# Altium PCB Analog_Multiplier.PcbDoc
Units mil, origin at the board's own origin, x right, y up, seen from the top; angles counter-clockwise.
Board outline 6000 x 4000 mil, 2 copper layers (Top Layer, Bottom Layer); 16 components, 10 nets, 49 pads, 0 vias.
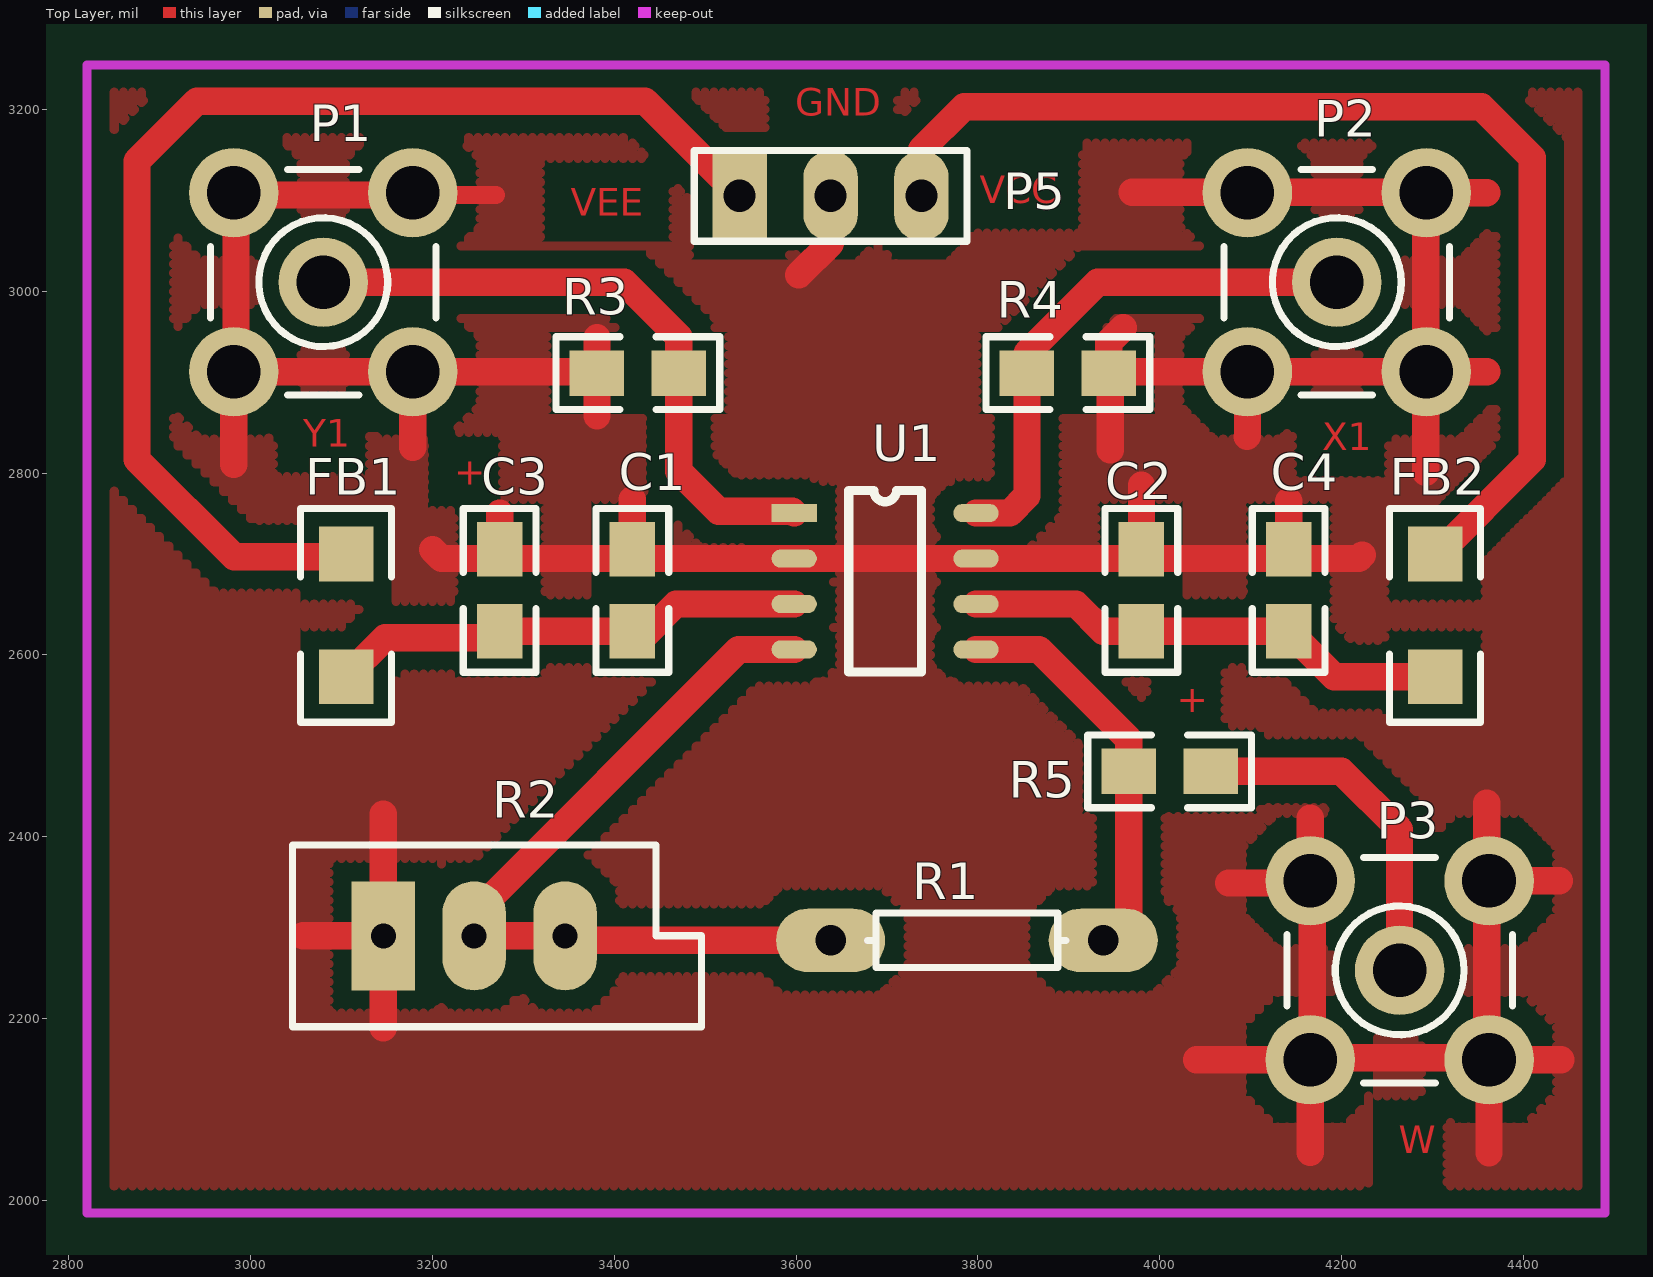
[diagram p0: Top Layer view]
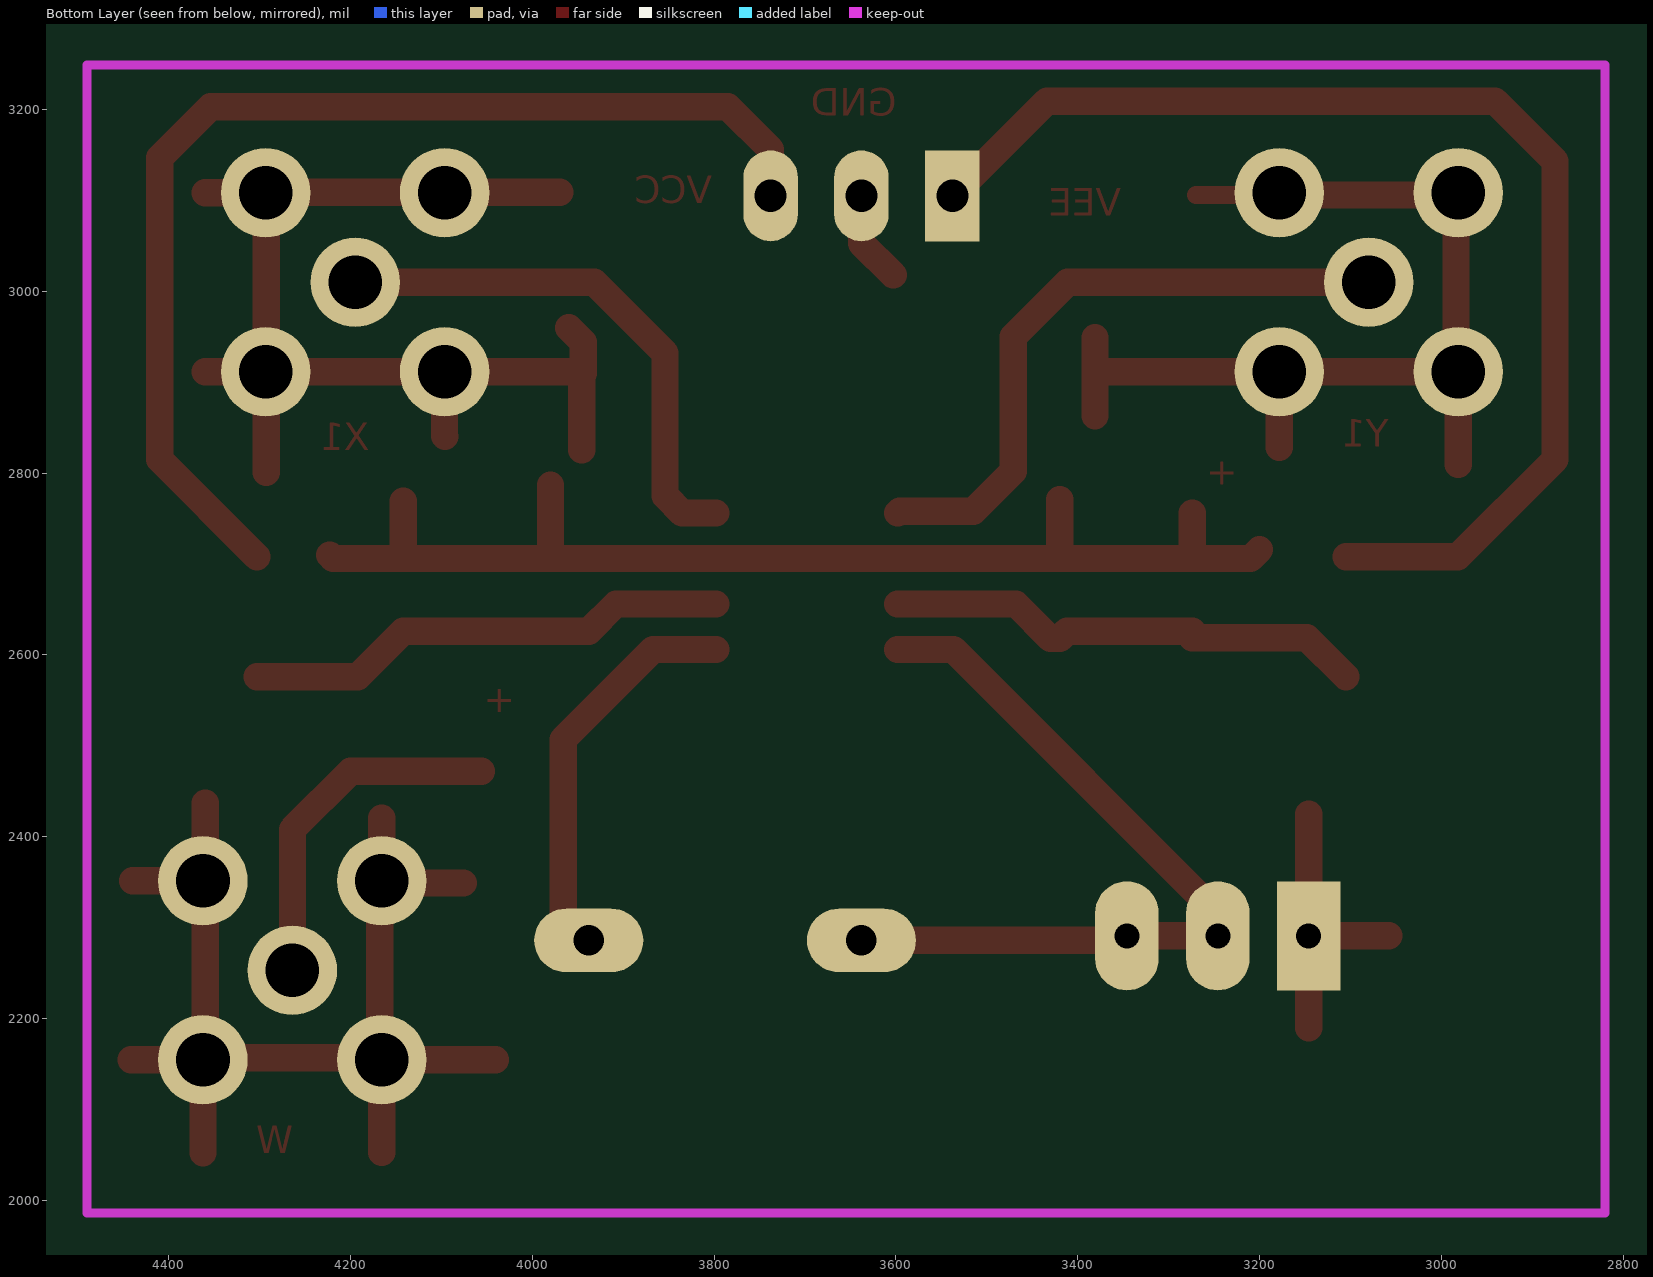
[diagram p1: Bottom Layer view, seen from below]

## Layer stack, top to bottom
Top Solder: solder mask 0.4, Solder Resist, Dk 3.5
Top Layer: signal copper 1.4
Dielectric1: dielectric 12.6, FR-4, Dk 4.8
Bottom Layer: signal copper 1.4
Bottom Solder: solder mask 0.4, Solder Resist, Dk 3.5

## Board outline
1000,1000 7000,1000 7000,5000 1000,5000

## Design rules (kind name [scope] priority, off if disabled: settings)
Clearance [All] p1: gap=20 ignorepadtopadclearanceinfootprint=FALSE except(0: Arc-Hole Track-Hole SMDPad-Hole THPad-Hole Via-Hole Fill-Hole Poly-Hole Region-Hole Text-Hole)
PolygonConnect [All] p1: connectstyle=Relief reliefconductorwidth=10 reliefentries=4 polygonreliefangle="90 Angle" airgapwidth=10
RoutingVias [All] p1: holewidth=28 width=50 viastyle="Through Hole" minholewidth=28 minwidth=50 maxholewidth=28 maxwidth=50
SilkToSolderMaskClearance SilkscreenOverComponentPads [IsPad] p1: minsilkscreentomaskgap=10 clearancetoexposedcopper=TRUE
SolderMaskExpansion [All] p1: expansion=4
Width [All] p1: maxlimit=50 minlimit=20 preferedwidth=30
29 further rules are at their usual default settings.

## Components (designator, comment, footprint, x,y, rotation, side; value= is the part's Value field where it differs from the comment)
C1 "Cap Pol3" 0805 3420,2716 r270 top
C2 "Cap Pol3" 0805 3980,2626 r90 top
C3 "Cap Semi" 0805 3274,2626 r90 top
C4 "Cap Semi" 0805 4142,2626 r90 top
FB1 "Res2" 1206 3105,2576 r90 top
FB2 "Res2" 1206 4303,2711 r270 top
P1 "SMB" SMB_V-RJ45 3080,3010 r0 top
P2 "SMB" SMB_V-RJ45 4195,3010 r0 top
P3 "SMB" SMB_V-RJ45 4264,2253 r270 top
P5 "Header 3" HDR1X3 3538,3105 r0 top
R1 "Res1" AXIAL-0.3 3788,2286 r0 top
R2 "RPot" VR5 3246,2291 r0 top
R3 "Res1" 0805 3471,2910 r180 top
R4 "Res1" 0805 3944,2910 r180 top
R5 "Res1" 0805 4056,2472 r180 top
U1 "AD835" "AD835_SOP8 - duplicate1" 3598,2756 r0 top

## Footprints (in the part's own frame and the unit in brackets; to place one, negate y for a bottom-side part, rotate by r counter-clockwise, add the part's x,y. Pads: shape width x height; smd on the part's side, far side on the other; paste and mask are expansions set on the pad)
0805 [mil]
  rect 60x50 smd: 1(0,0) 2(90,0)
  silkscreen extent -45,-40 135,40
1206 [mil]
  rect 60x60 smd: 1(0,0) 2(135,0)
  silkscreen extent -50,-50 185,50
"AD835_SOP8 - duplicate1" [mil]
  rect 50x20 smd: 1(0,0)
  oval 50x20 smd: 2(0,-50) 3(0,-100) 4(0,-150) 5(200,-150) 6(200,-100) 7(200,-50) 8(200,0)
  silkscreen extent 60,-175 140,25
AXIAL-0.3 [mil] "Axial Device, Thru-Hole; 2 Leads; 0.3 in P"
  oval 120x70 hole 33.46: 1(-150,0) 2(150,0)
  silkscreen extent -109,-30 109,30
HDR1X3 [mil] "Connector; Header;"
  rect 60x100 hole 35.43: 1(0,0)
  oval 60x100 hole 35.43: 2(100,0) 3(200,0)
  silkscreen extent -50,-50 250,50
SMB_V-RJ45 [mm] "Connector; S"
  round 2.5 hole 1.5: 1(0,0) 2(-2.5,-2.5) 2(-2.5,2.5) 2(2.5,-2.5) 2(2.5,2.5)
  silkscreen extent -3.15,-3.15 3.15,3.15
VR5 [mil] "Thru-Hol"
  rect 70x120 hole 27.56: 1(-100,0)
  oval 70x120 hole 27.56: 2(0,0) 3(100,0)
  silkscreen extent -200,-100 250,100

## Part data
C1 C2: "Polarized Capacitor"
C3 C4: "Capacitor (Semicond"
P1 P2 P3: "SMB Straight Connector"
P5: "Header, 3-Pin"
R1: "Resistor"
R2: "Potentiometer"
U1: library part Compone

## Nets (pads, with @x,y where several pads share a name; then routed paths per layer and width w, separated by ;. In a path a pad name is that pad's centre, name@x,y a point inside that pad or via, vN(x,y) a via of type N, cw(c..) or ccw(c..) an arc to the next point about the centre after c; other vN are vias at no path point)
GND: C1.1 C2.2 C3.2 C4.2 P1.2 P2.2 P3.2 P5.2 R2.1 R3.2 R4.1 U1.2 U1.7 | length 5461.2
  Top Layer w20: P1.2@3180.85,3106 3270,3106
  Top Layer w30: 2981.57,2809.57 2981.57,2911.57 P1.2@2984,2911.57 ; 3058,2291 R2.1 ; 3146,2190 R2.1 ; 3146,2425 R2.1 ; 3178.43,2828.43 P1.2@3178.43,2911.57 ; P1.2@3180.85,3106 2984,3106 P1.2@2984,2911.57 ; 3200,2716 3210,2706 U1.2 U1.7 4219,2706 4223,2710 ; C3.2 3274,2756 ; 3381,2863 R3.2 ; 3381,2949 R3.2 ; C1.1 3420,2771 ; 3603,3018 3638,3053 P5.2 ; R4.1 3944,2944 3960,2960 ; 3945.57,2825.43 3945.57,2911.57 P2.2@4096.57,2911.57 ; 3970,3109 4292.85,3109 P2.2@4292.85,2911.57 ; C2.2 3980,2787 ; 4040.57,2154.57 4165.57,2154.57 4165.57,2052.57 ; 4076,2349 4168,2349 4168,2157 4360,2157 4360,2437 ; 4096,2840.21 4096.57,2840.79 P2.2@4096.57,2911.57 ; C4.2 4142,2769 ; P3.2@4165.57,2351.43 4165.57,2420.64 ; 4292.85,2800.85 P2.2@4292.85,2911.57 ; P2.2@4293.43,3108.43 4360,3108.43 ; 4360,2911.57 4293.43,2911.57 P2.2@4292.85,2911.57 ; 4362.43,2052.43 4362.43,2154.57 4441.57,2154.57 ; P3.2@4362.43,2351.43 4439.75,2351.43 ; P1.2@2984,2911.57 P1.2@3178.43,2911.57 ; P1.2@3178.43,2911.57 3379.43,2911.57 R3.2 ; P2.2@4096.57,2911.57 P2.2@4292.85,2911.57
NetC1_2: C1.2 C3.1 FB1.1 U1.3 | length 529.9
  Top Layer w30: FB1.1 3148,2619 C3.1@3274,2619 ; C3.1 3412,2626 3420,2618 3430,2618 3468,2656 U1.3
NetC2_1: C2.1 C4.1 FB2.2 U1.6 | length 538.1
  Top Layer w30: U1.6 3908,2656 3938,2626 C2.1 C4.1 4192,2576 FB2.2
NetR1_1: R1.1 R2.2 R2.3 U1.4 | length 890.6
  Top Layer w30: U1.4 3537,2606 3246,2315 R2.2 R2.3 3351,2286 R1.1
NetR1_2: R1.2 R5.2 U1.5 | length 441.6
  Top Layer w30: U1.5 3867,2606 3966,2507 R5.2 3966,2314 R1.2
VCC: FB2.1 P5.3 | length 1249
  Top Layer w30: P5.3 3738,3156 3785,3203 4354,3203 4410,3147 4410,2815 FB2.1@4303,2708
VEE: FB1.2 P5.1 | length 1335.7
  Top Layer w30: FB1.2@3105,2708 2982,2708 2875,2815 2875,3143 2941,3209 3434,3209 P5.1
W: P3.1 R5.1 | length 389.5
  Top Layer w30: R5.1 4200,2472 4264,2408 P3.1
X1: P2.1 R4.2 U1.8 | length 594.2
  Top Layer w30: U1.8 3835,2756 3854,2775 3854,2914 3854,2932 3932,3010 P2.1
Y1: P1.1 R3.1 U1.1 | length 709.9
  Top Layer w30: P1.1 3411,3010 3471,2950 R3.1 3471,2802 3515,2758 3596,2758 U1.1

## Polygon pours and split planes (outlines as drawn)
GND on Top Layer "Bottom Layer-No Net" (hatched 90Degree grid 10 track 10, pour order 15): 2820,3249 4484,3249 4490,3243 4490,1986 2827,1986 2818,1995

## Keep-outs
Keep-Out Layer:
  lines w10: 2820,1986 4490,1986 4490,3249 2820,3249 2820,1986

## Other copper
Top Layer:
  text "GND" at 3599,3193 h30
  text "VCC" at 3802,3097 h30
  text "VEE" at 3352,3083 h30
  text "Y1" at 3058,2829 h30
  text "X1" at 4179,2825 h30
  text "+" at 3224,2787 h30
  text "+" at 4019,2537 h30
  text "W" at 4263,2052 h30